# EAGLE board display_schematic (EAGLE 6.4)
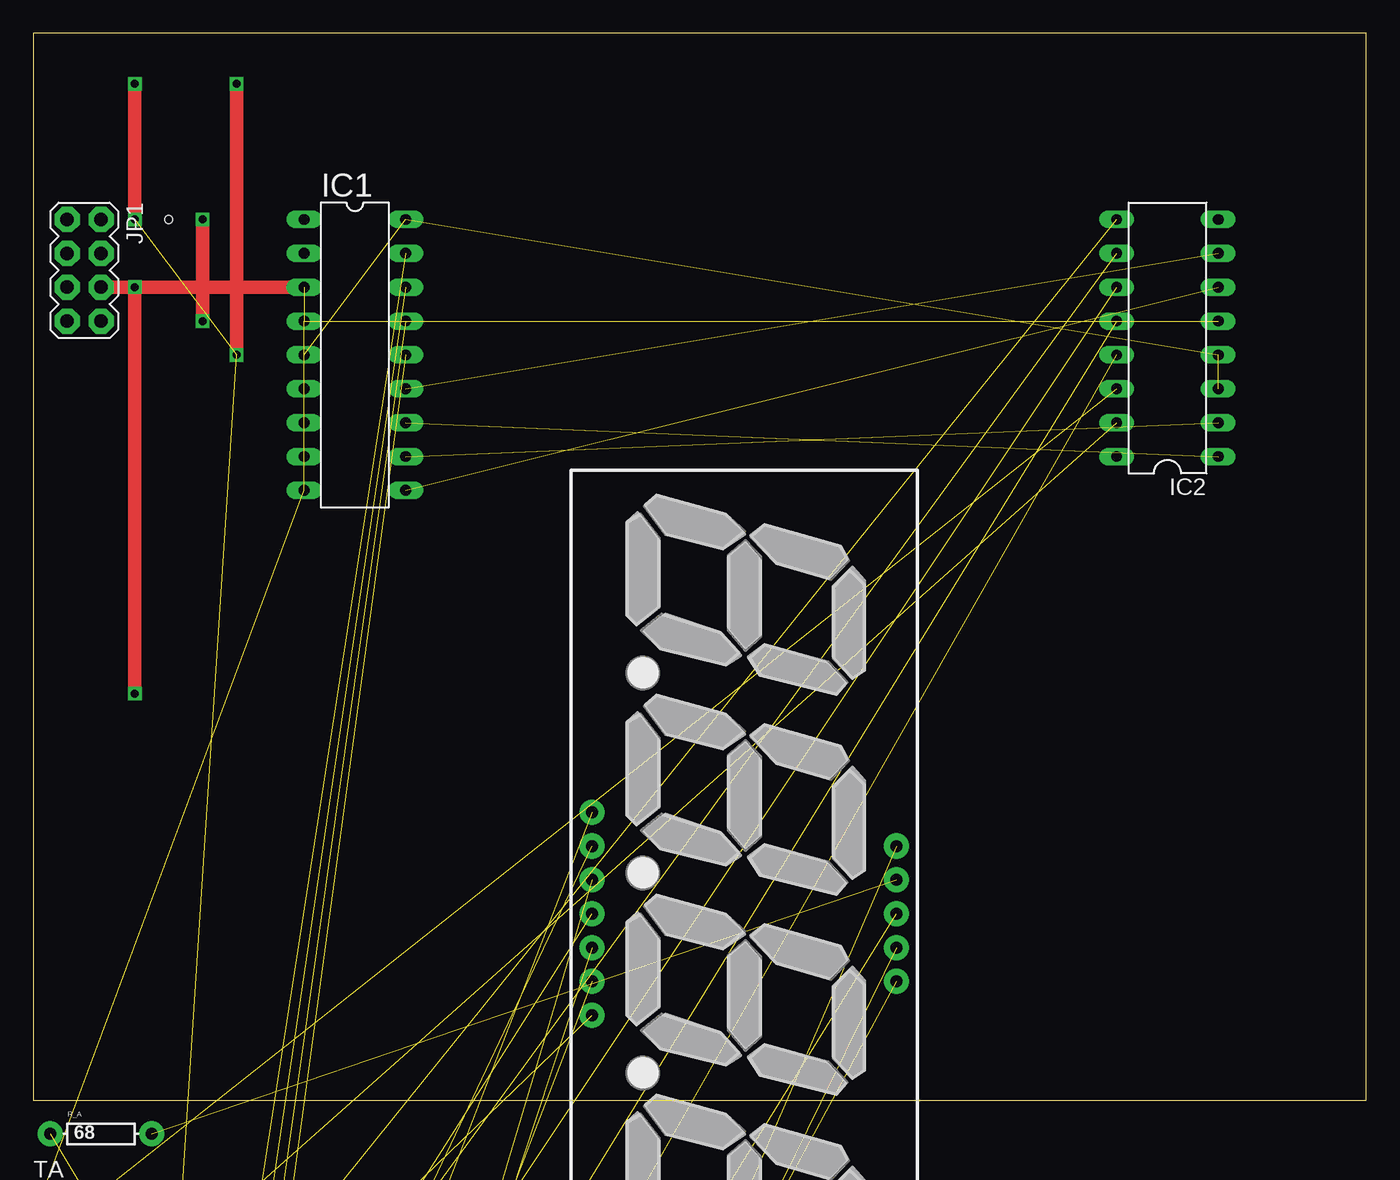
[diagram p0: board, top side]
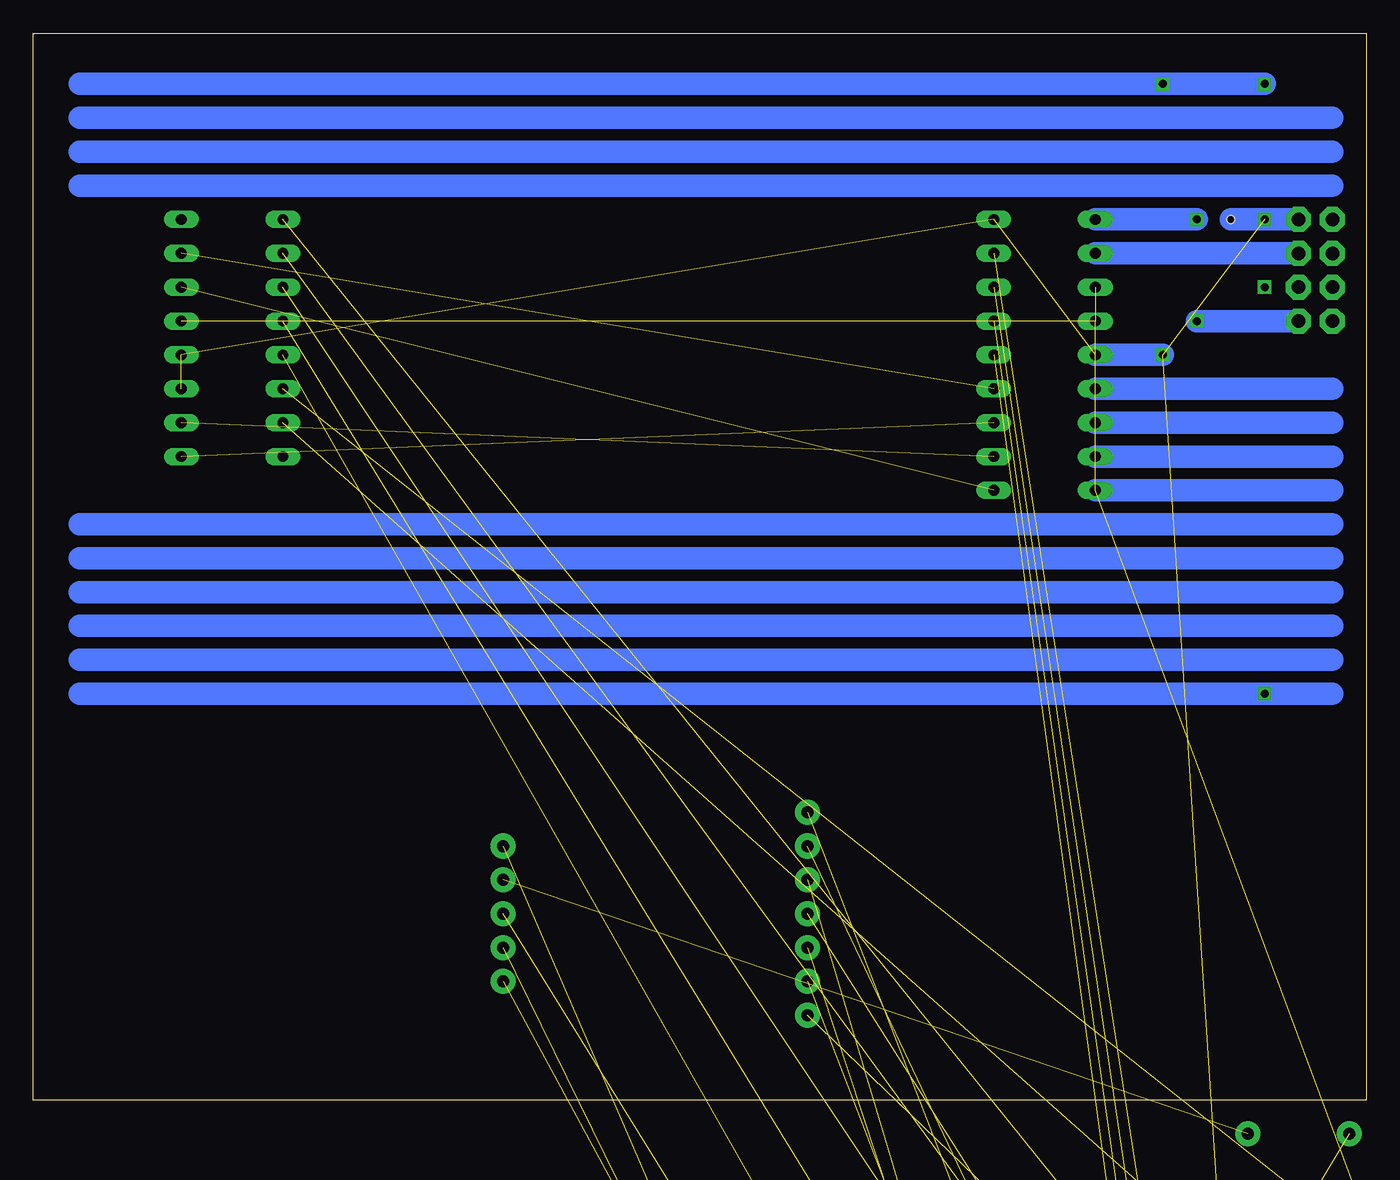
[diagram p1: board, bottom side, seen from below]

Size 100 x 80 mm. Coordinates in mm from the lower left corner, seen from the top.
Outline: 0,0 100,0 100,80 0,80 0,0
Copper layers (1*16): Top 0.035mm / dielectric 1.5mm / Bottom 0.035mm
Design rules "default": minimum track width 10mil, minimum drill 24mil, track to track 8mil, track to pad 8mil, pad to pad 8mil, via to via 8mil, smd to smd 8mil, copper to edge 40mil, drill to drill 8mil, minimum pad ring 10mil, minimum via ring 8mil, stop-mask expansion 4mil, vias tented up to drill 0mil, thermal gap 10mil
Holes 0.6 mm at 10.16,66.04

## Footprints (pad centres in the part's own frame; a part is rotated, then mirrored left to right if it is on the bottom)
7SEG-4DIG-NEW = drill 0.9 pad 1.88: 1 -6.35,-11.43; 2 -3.81,-11.43; 3 -1.27,-11.43; 4 1.27,-11.43; 5 3.81,-11.43; 6 6.35,-11.43; 7 8.89,-11.43; 8 6.35,11.43; 9 3.81,11.43; 10 1.27,11.43; 11 -1.27,11.43; 12 -3.81,11.43
DIL18 = drill 0.813 long: 1 -10.16,-3.81; 2 -7.62,-3.81; 3 -5.08,-3.81; 4 -2.54,-3.81; 5 0,-3.81; 6 2.54,-3.81; 7 5.08,-3.81; 8 7.62,-3.81; 9 10.16,-3.81; 10 10.16,3.81; 11 7.62,3.81; 12 5.08,3.81; 13 2.54,3.81; 14 0,3.81; 15 -2.54,3.81; 16 -5.08,3.81; 17 -7.62,3.81; 18 -10.16,3.81
DIL16 = drill 0.813 long: 1 -8.89,-3.81; 2 -6.35,-3.81; 3 -3.81,-3.81; 4 -1.27,-3.81; 5 1.27,-3.81; 6 3.81,-3.81; 7 6.35,-3.81; 8 8.89,-3.81; 9 8.89,3.81; 10 6.35,3.81; 11 3.81,3.81; 12 1.27,3.81; 13 -1.27,3.81; 14 -3.81,3.81; 15 -6.35,3.81; 16 -8.89,3.81
2X4 = drill 1.016 pad 1.88 octagon: 1 -3.81,-1.27; 2 -3.81,1.27; 3 -1.27,-1.27; 4 -1.27,1.27; 5 1.27,-1.27; 6 1.27,1.27; 7 3.81,-1.27; 8 3.81,1.27
AXIAL-0.3 = drill 0.9 pad 1.88: P$1 -3.81,0; P$2 3.81,0
TO92-EBC-OVAL = drill 0.813 long: B 0,-1.27; C 2.54,-1.27; E -2.54,-1.27

## Placement (x,y rotation side)
DISPLAY7S4D1  7SEG-4DIG-NEW  [7SEG-4DIG-NEW]  53.34,15.24 270 top
IC1  MCP2300X/P  [DIL18]  24.13,55.88 270 top
IC2  4511N  [DIL16]  85.09,57.15 90 top
JP1  M04X2  [2X4]  3.81,62.23 270 top
R_A  68  [AXIAL-0.3]  5.08,-2.54 0 top
R_A1  68  [AXIAL-0.3]  5.08,-25.4 0 top  (outside the outline)
R_A2  68  [AXIAL-0.3]  5.08,-38.1 0 top  (outside the outline)
R_A3  68  [AXIAL-0.3]  5.08,-50.8 0 top  (outside the outline)
R_A4  68  [AXIAL-0.3]  5.08,-63.5 0 top  (outside the outline)
R_A5  68  [AXIAL-0.3]  5.08,-76.2 0 top  (outside the outline)
R_A6  68  [AXIAL-0.3]  5.08,-88.9 0 top  (outside the outline)
R_A7  68  [AXIAL-0.3]  5.08,-93.98 0 top  (outside the outline)
TA  2N2222  [TO92-EBC-OVAL]  2.54,-7.62 0 top  (outside the outline)
TA1  2N2222  [TO92-EBC-OVAL]  2.54,-17.78 0 top  (outside the outline)
TA2  2N2222  [TO92-EBC-OVAL]  2.54,-30.48 0 top  (outside the outline)
TA3  2N2222  [TO92-EBC-OVAL]  2.54,-43.18 0 top  (outside the outline)
TA4  2N2222  [TO92-EBC-OVAL]  2.54,-55.88 0 top  (outside the outline)
TA5  2N2222  [TO92-EBC-OVAL]  2.54,-68.58 0 top  (outside the outline)
TA6  2N2222  [TO92-EBC-OVAL]  2.54,-81.28 0 top  (outside the outline)
TA7  2N2222  [TO92-EBC-OVAL]  2.54,-99.06 0 top  (outside the outline)
TA8  2N2222  [TO92-EBC-OVAL]  2.54,-109.22 0 top  (outside the outline)
TA9  2N2222  [TO92-EBC-OVAL]  2.54,-119.38 0 top  (outside the outline)
TA10  2N2222  [TO92-EBC-OVAL]  2.54,-129.54 0 top  (outside the outline)

## Library data of the parts
DISPLAY7S4D1 = SparkFun-Displays
IC1 TA TA1-TA10 = adafruit
IC2 = 45xx
JP1 = SparkFun-Connectors
R_A R_A1-R_A7 = SparkFun-Resistors

## Nets
N$1: IC1.5 IC1.18 IC2.3 IC2.4 JP1.2 TA7.C TA8.C TA9.C TA10.C
N$2: IC1.3 IC1.4 IC1.9 IC2.5 JP1.6 R_A7.P$1 TA1.E TA2.E TA3.E TA4.E TA5.E TA6.E TA.E
N$3: IC1.2 JP1.4
N$4: IC1.1 JP1.8
N$5: IC2.14 TA.B
N$6: DISPLAY7S4D1.11 R_A.P$2
N$7: IC1.13 IC2.7
N$8: IC1.11 IC2.2
N$9: IC1.12 IC2.1
N$10: IC1.10 IC2.6
N$11: IC1.14 TA10.B
N$12: IC1.15 TA9.B
N$13: IC1.16 TA8.B
N$14: IC2.15 TA1.B
N$15: DISPLAY7S4D1.7 R_A1.P$2
N$16: IC2.9 TA2.B
N$17: DISPLAY7S4D1.4 R_A2.P$2
N$18: DISPLAY7S4D1.2 R_A3.P$2
N$19: IC1.17 TA7.B
N$21: DISPLAY7S4D1.1 R_A4.P$2
N$25: DISPLAY7S4D1.10 R_A5.P$2
N$26: DISPLAY7S4D1.5 R_A6.P$2
N$27: IC2.10 TA3.B
N$28: IC2.11 TA4.B
N$39: IC2.12 TA5.B
N$40: IC2.13 TA6.B
N$41: DISPLAY7S4D1.3 R_A7.P$2
N$42: DISPLAY7S4D1.6 TA7.E
N$43: DISPLAY7S4D1.8 TA8.E
N$44: DISPLAY7S4D1.9 TA9.E
N$45: DISPLAY7S4D1.12 TA10.E
TR_A: R_A.P$1 TA.C
TR_A1: R_A1.P$1 TA1.C
TR_A2: R_A2.P$1 TA2.C
TR_A3: R_A3.P$1 TA3.C
TR_A4: R_A4.P$1 TA4.C
TR_A5: R_A5.P$1 TA5.C
TR_A6: R_A6.P$1 TA6.C
VDD: IC2.16
VSS: IC2.8

## Tracks (layer width: path | path; a pad name or v marks a point on that pad's centre or on a via)
N$1  (8 unrouted)
  Bottom 1.676: JP1.2 7.62,66.04 | IC1.5 15.24,55.88
N$2  (11 unrouted)
  Top 1.016: JP1.6 IC1.3
N$3
  Bottom 1.676: JP1.4 IC1.2
N$4  (via drill 0.6)
  Top 1.016: v12.7,66.04 v12.7,58.42
  Bottom 1.676: JP1.8 v12.7,58.42 | IC1.1 v12.7,66.04
N$5  (1 unrouted)
N$6  (1 unrouted)
N$7  (1 unrouted)
N$8  (1 unrouted)
N$9  (1 unrouted)
N$10  (1 unrouted)
N$11  (1 unrouted)
N$12  (1 unrouted)
N$13  (1 unrouted)
N$14  (1 unrouted)
N$15  (1 unrouted)
N$16  (1 unrouted)
N$17  (1 unrouted)
N$18  (1 unrouted)
N$19  (1 unrouted)
N$20
  Bottom 1.676: 2.54,33.02 96.52,33.02
N$21  (1 unrouted)
N$22
  Bottom 1.676: 2.54,68.58 96.52,68.58
N$23
  Bottom 1.676: 2.54,71.12 96.52,71.12
N$24
  Bottom 1.676: 2.54,73.66 96.52,73.66
N$25  (1 unrouted)
N$26  (1 unrouted)
N$27  (1 unrouted)
N$28  (1 unrouted)
N$29  (via drill 0.6)
  Top 1.016: v7.62,66.04 v7.62,76.2 | v15.24,55.88 v15.24,76.2
  Bottom 1.676: v7.62,66.04 10.16,66.04 | v7.62,76.2 v15.24,76.2 96.52,76.2
N$30
  Bottom 1.676: 2.54,53.34 20.32,53.34
N$31
  Bottom 1.676: 2.54,50.8 20.32,50.8
N$32
  Bottom 1.676: 2.54,48.26 20.32,48.26
N$33
  Bottom 1.676: 2.54,45.72 20.32,45.72
N$34
  Bottom 1.676: 2.54,43.18 96.52,43.18
N$35
  Bottom 1.676: 2.54,40.64 96.52,40.64
N$36
  Bottom 1.676: 2.54,38.1 96.52,38.1
N$37
  Bottom 1.676: 2.54,35.56 96.52,35.56
N$38  (via drill 0.6)
  Top 1.016: v7.62,60.96 v7.62,30.48
  Bottom 1.676: 2.54,30.48 v7.62,30.48 96.52,30.48
N$39  (1 unrouted)
N$40  (1 unrouted)
N$41  (1 unrouted)
N$42  (1 unrouted)
N$43  (1 unrouted)
N$44  (1 unrouted)
N$45  (1 unrouted)
TR_A  (1 unrouted)
TR_A1  (1 unrouted)
TR_A2  (1 unrouted)
TR_A3  (1 unrouted)
TR_A4  (1 unrouted)
TR_A5  (1 unrouted)
TR_A6  (1 unrouted)